# Altium PCB Copy of brd2.PcbDoc
Units mil, origin at the board's own origin, x right, y up, seen from the top; angles counter-clockwise.
Board outline 3500 x 2000 mil, 2 copper layers (Top Layer, Bottom Layer), stack 61.756 mil thick; 51 components, 36 nets, 157 pads, 0 vias.
Unrouted connection lines stored in the file: 82.
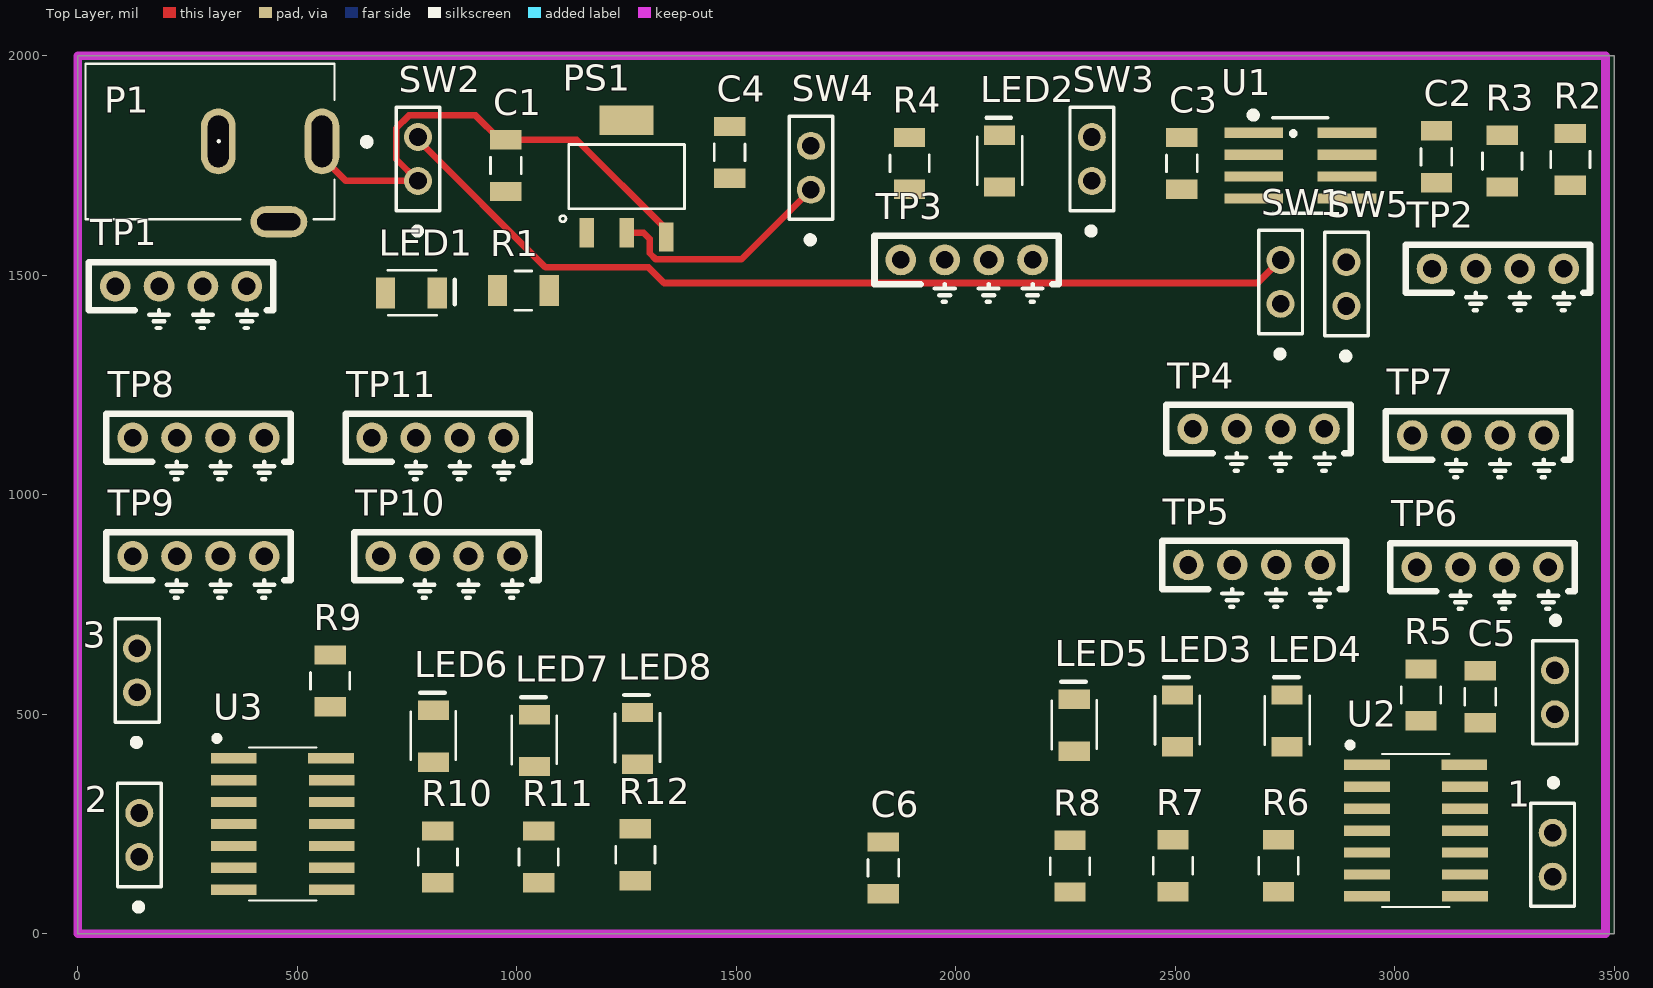
[diagram p0: Top Layer view]
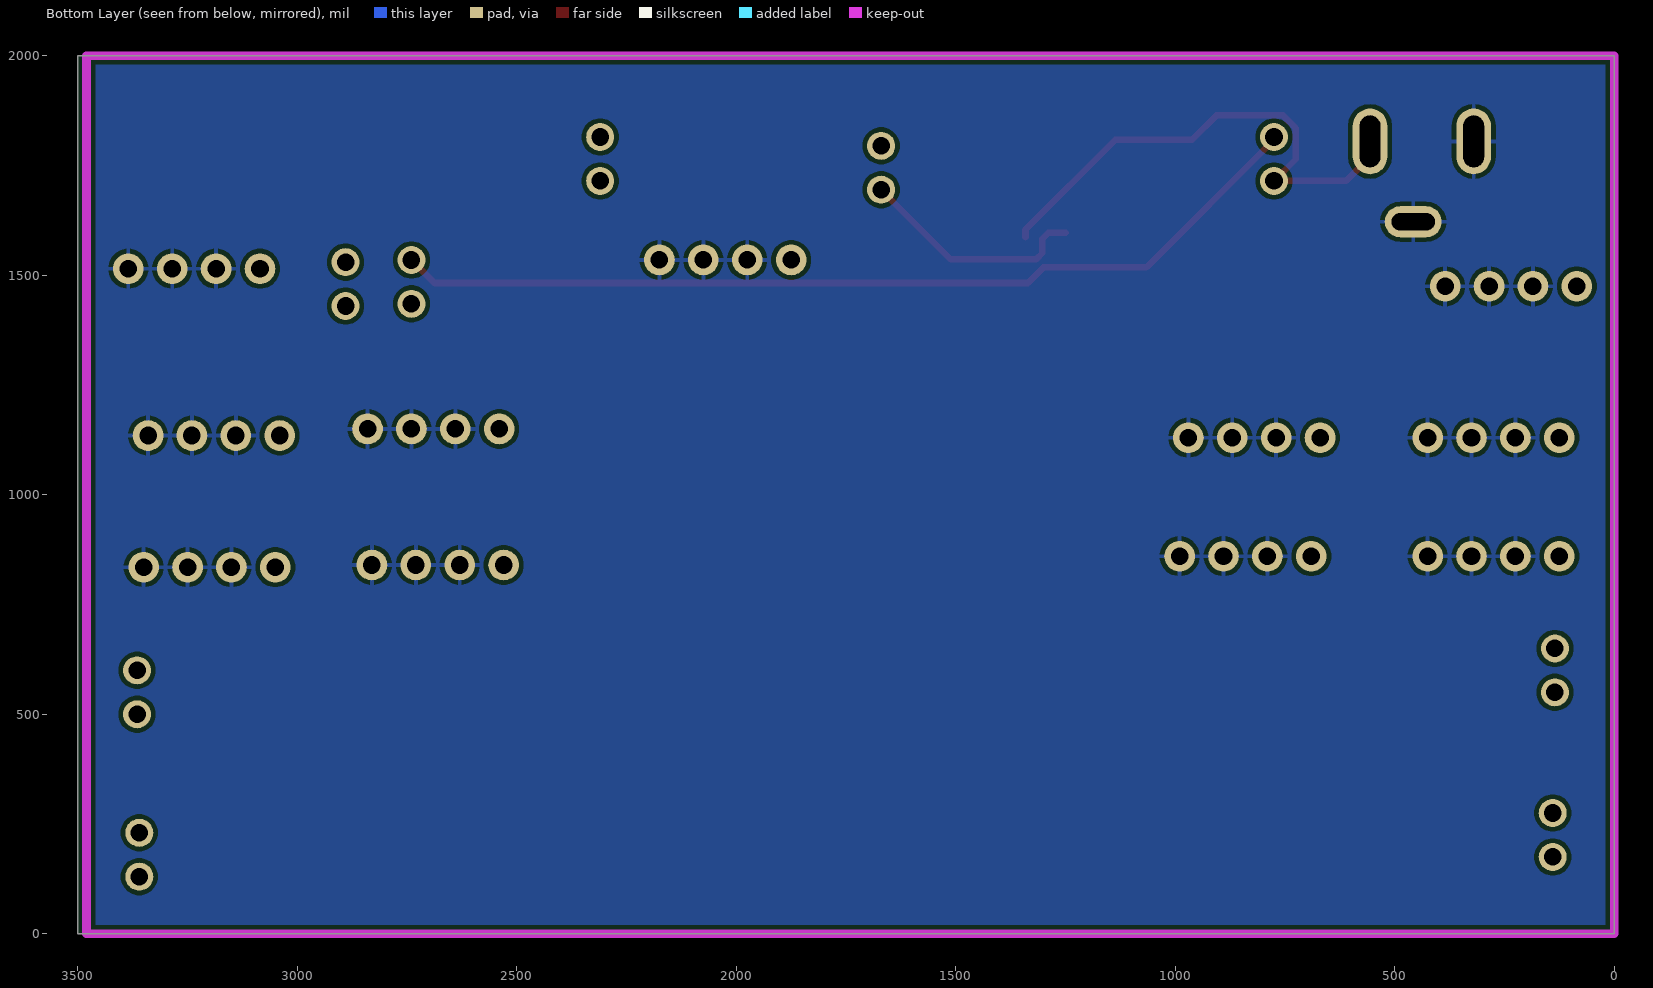
[diagram p1: Bottom Layer view, seen from below]

## Layer stack, top to bottom
Top Solder: solder mask 1, SM-001, Dk 4
Top Layer: signal copper 1.378
Dielectric 1: core 59, Core-043, Dk 4.3
Bottom Layer: signal copper 1.378
Bottom Solder: solder mask 1, SM-001, Dk 4

## Board outline
0,0 3500,0 3500,2000 0,2000

## Design rules (kind name [scope] priority, off if disabled: settings)
BoardOutlineClearance [All] p1: gap=10 ignorepadtopadclearanceinfootprint=FALSE except(0: Arc-SplitContinuation Track-SplitContinuation SMDPad-SplitContinuation THPad-SplitContinuation Via-SplitContinuation Fill-SplitContinuation Poly-SplitContinuation Region-SplitContinuation Text-SplitContinuation)
Clearance [All] p1: gap=10 ignorepadtopadclearanceinfootprint=FALSE
PlaneClearance [All] p1: clearance=10
PlaneConnect [All] p1: planeconnectstyle=Direct reliefexpansion=20 reliefentries=4 reliefconductorwidth=10 reliefairgap=10
PolygonConnect [All] p1: thpad.connectstyle=Relief thpad.reliefconductorwidth=10 thpad.reliefentries=4 thpad.polygonreliefangle="90 Angle" thpad.airgapwidth=10 smdpad.connectstyle=Direct smdpad.reliefconductorwidth=10 smdpad.reliefentries=4 smdpad.polygonreliefangle="90 Angle" smdpad.airgapwidth=10 via.connectstyle=Direct via.reliefconductorwidth=10 via.reliefentries=4 via.polygonreliefangle="90 Angle" via.airgapwidth=10
RoutingVias [All] p1: holewidth=13 width=25 viastyle="Through Hole" minholewidth=13 minwidth=25 maxholewidth=60 maxwidth=80
SolderMaskExpansion [All] p1: expansion=4 istentingtop=FALSE
UnRoutedNet [All] p1: checkbadconnections=TRUE
Width [InNet('No Net')] p1: maxlimit=100 minlimit=6 preferedwidth=6 minimp=50.000000 maximp=50.000000 favimp=50.000000
27 further rules are at their usual default settings.

## Components (designator, comment, footprint, x,y, rotation, side; value= is the part's Value field where it differs from the comment)
1 "3.3v en" 2Pin-Header-Conn 3360,230 r270 top
2 "5v enable" 2Pin-Header-Conn 140,175 r90 top
3 "3.3v en" 2Pin-Header-Conn 135,550 r90 top
C1 "22uF" 1206_Passive_Capacitor 975,1750 r90 top
C2 "1uF" 1206_Passive_Capacitor 3095,1770 r90 top
C3 "22uF" 1206_Passive_Capacitor 2515,1755 r90 top
C4 "1uF" 1206_Passive_Capacitor 1485,1780 r90 top
C5 "22uF" 1206_Passive_Capacitor 3195,540 r270 top
C6 "22uF" 1206_Passive_Capacitor 1835,150 r90 top
LED1 "Red" LED_1206 760,1460 r0 top
LED2 "Red" LED_1206 2100,1760 r90 top
LED3 "Red" LED_1206 2505,485 r90 top
LED4 "Red" LED_1206 2755,485 r90 top
LED5 "Red" LED_1206 2270,475 r90 top
LED6 "Red" LED_1206 810,450 r90 top
LED7 "Red" LED_1206 1040,440 r90 top
LED8 "Red" LED_1206 1275,445 r90 top
P1 "Power Jack" Power_Jack 556.22,1805 r180 top value="CONN PWR JACK 2X5.5MM SOLDER"
PS1 "AMS1117-3.3" LDO 1250,1725 r0 top value="IC REG LINEAR 3.3V 800MA SOT223"
R1 "1k" 1206_Passive_Resitor 1015,1465 r0 top value="1K Ohm"
R2 "1k" 1206_Passive_Resitor 3400,1764 r90 top value="1K Ohm"
R3 "1k" 1206_Passive_Resitor 3245,1760 r90 top value="1K Ohm"
R4 "1k" 1206_Passive_Resitor 1895,1755 r90 top value="1K Ohm"
R5 "1k" 1206_Passive_Resitor 3060,544 r90 top value="10K Ohm"
R6 "" 1206_Passive_Resitor 2735,155 r90 top value="50 Ohm"
R7 "" 1206_Passive_Resitor 2495,155 r90 top value="50 Ohm"
R8 "" 1206_Passive_Resitor 2260,154 r90 top value="50 Ohm"
R9 "1k" 1206_Passive_Resitor 575,576 r90 top value="10K Ohm"
R10 "" 1206_Passive_Resitor 820,175 r90 top value="50 Ohm"
R11 "" 1206_Passive_Resitor 1050,175 r90 top value="50 Ohm"
R12 "" 1206_Passive_Resitor 1270,180 r90 top value="50 Ohm"
SW1 "555_off/on_switch" 2Pin-Header-Conn 2740,1435 r90 top
SW2 "5v power enable" 2Pin-Header-Conn 775,1715 r90 top
SW3 "3.3 powerline enable" 2Pin-Header-Conn 2310,1715 r90 top
SW4 "filter cap enable" 2Pin-Header-Conn 1670,1695 r90 top
SW5 "555_off/on_switch" 2Pin-Header-Conn 2890,1430 r90 top
TP1 "5v TP" TP10x_Probe 235,1475 r0 top
TP2 "555_out_tp" TP10x_Probe 3235,1515 r0 top
TP3 "3.3v tp" TP10x_Probe 2025,1535 r0 top
TP4 "Qlow TP" TP10x_Probe 2690,1150 r0 top
TP5 "!555 TP" TP10x_Probe 2680,840 r0 top
TP6 "QHigh TP" TP10x_Probe 3200,835 r0 top
TP7 "R8 TP" TP10x_Probe 3190,1135 r0 top
TP8 "Qlow TP" TP10x_Probe 275,1130 r0 top
TP9 "!555 TP" TP10x_Probe 275,860 r0 top
TP10 "QHigh TP" TP10x_Probe 840,860 r0 top
TP11 "R12 TP" TP10x_Probe 820,1130 r0 top
U1 "LMC555CMX/NOPB" TS555IDTTR 2785,1750 r0 top
U2 "SN74AHC14DR" HEX_74AC14 3048.35,235 r0 top
U3 "SN74AHC14DR" HEX_74AC14 466.65,250 r0 top
? "5v enable" 2Pin-Header-Conn 3365,600 r270 top

## Footprints (in the part's own frame and the unit in brackets; to place one, negate y for a bottom-side part, rotate by r counter-clockwise, add the part's x,y. Pads: shape width x height; smd on the part's side, far side on the other; paste and mask are expansions set on the pad)
2Pin-Header-Conn [mm]
  round 1.62 hole 1.02: 1(0,0) 2(2.54,0)
  silkscreen extent -3.03,-1.27 4.26,1.26, body extent -1.27,-1.27 3.81,1.27, height 8.13
1206_Passive_Capacitor [mil]
  rect 44x71 smd: 1(-59,0) 2(59,0)
  silkscreen extent -19,-35 19,35, body extent -63,-31 63,32, height 50
1206_Passive_Resitor [mil]
  rect 44x71 smd: 1(-59,0) 2(59,0)
  silkscreen extent -19,-45 19,45, body extent -61,-31 61,31, height 26
HEX_74AC14 [mm]
  rect 2.65x0.6 smd: 1(-2.836,3.81) 2(-2.836,2.54) 3(-2.836,1.27) 4(-2.836,0) 5(-2.836,-1.27) 6(-2.836,-2.54) 7(-2.836,-3.81) 8(2.836,-3.81) 9(2.836,-2.54) 10(2.836,-1.27) 11(2.836,0) 12(2.836,1.27) 13(2.836,2.54) 14(2.794,3.81)
  silkscreen extent -3.94,-4.43 1.95,5.08, body extent -3.18,-4.35 2.82,4.3, height 1.75
LDO [mm]
  rect 0.838x1.7 smd: 1(-2.311,-3.25) 2(0,-3.25) 3(2.311,-3.5)
  rect 3.099x1.7 smd: 4(0,3.25)
  silkscreen extent -3.86,-2.62 3.35,1.85, body extent -3.25,-3.65 3.25,3.35, height 1.85
LED_1206 [mil]
  rect 44x71 smd: 1(-59,0) 2(59,0)
  silkscreen extent -54,-51 99,51, body extent -63,-31 63,31, height 28
Power_Jack [mm]
  oval 2x3.8 hole 1.2 slot 3 at 90 deg: 1(0,0) 2(6,0)
  oval 3.3x1.8 hole 1 slot 2.5 at 0 deg: 3(2.5,4.65)
  silkscreen extent -2.79,-4.5 13.68,4.5, body extent -0.76,-4.45 13.64,4.95, height 11.49
TP10x_Probe [mil] "Small Probs footprint"
  round 70 hole 40: 1(-150,0) 2(-50,0) 2(50,0) 2(150,0)
  silkscreen extent -210,-95 210,55
TS555IDTTR [mm] "IC OSC Single Timer 2.7MHz 8SOIC"
  rect 3.4x0.6 smd: 1(-2.7,1.905) 2(-2.7,0.635) 3(-2.7,-0.635) 4(-2.7,-1.905) 5(2.7,-1.905) 6(2.7,-0.635) 7(2.7,0.635) 8(2.7,1.905)
  silkscreen extent -2.85,-2.77 1.6,3.05, body extent -3.03,-2.48 2.96,2.43, height 1.75

## Part data
1 2 3 SW1 SW2 SW3 SW4 SW5 ?: library part SW_2Pin_100mil_Switch, "2Pin Header", LCSC Part#=C124375, Type=Extended
C1 C3 C5 C6: library part C_22uF_1206, "22uF ±10% 25V X5R 1206 Multilayer Ceramic Capacitors MLCC - SMD/SMT RoHS", LCSC Part#=C12891, MFR Part #=CL31A226KAHNNNE, Datasheet=https://datasheet.lcsc.com/lcsc/1811031514_Samsung-Electro-Mechanics-CL31A226KAHNNNE_C12891.pdf, Type=basic
C2 C4: library part C_1uF_1206, "MULTILAYER CERAMIC CAPACITORS MLCC - SMD/SMT 1UF 50V 1206 ROHS", LCSC Part#=C1848, MFR Part #=CL31B105KBHNNNE, Digikey Link=https://www.digikey.com/product-detail/en/C1206C105M4RACTU/399-8150-1-ND/3471873/?itemSeq=304982366, Type=Basic
LED1 LED2 LED3 LED4 LED5 LED6 LED7 LED8: library part LED_RED_1206, "Red 621~631nm 1206 Light Emitting Diodes (LED) RoHS", LCSC Part#=C93133, MFR Part #=15-21/R6C-FQ1R1B/2T, Datasheet=https://datasheet.lcsc.com/szlcsc/1811151241_Everlight-Elec-15-21-R6C-FQ1R1B-2T_C93133.pdf, Type=Extended
P1: library part "P_Power Jack", "Power Barrel Connector Jack 2.10mm ID (0.083\"), 5.50mm OD (0.217\") Through Hole, Right Angle", LCSC Part#=C136744, MFR Part #=PJ-102A, Digikey Link=https://www.digikey.com/product-detail/en/PJ-102A/CP-102A-ND/275425/?itemSeq=304982367, Type=Extended
PS1: library part PS_AMS_LDO_3v3, "LOW DROPOUT REGULATORS(LDO) POSITIVE FIXED 1.3V @ 800MA 15V 3.3V 1A SOT-223 ROHS", LCSC Part#=C6186, MFR Part #=AMS1117-3.3, Type=Basic
R1 R2 R3 R4 R5 R9: library part R_1K_1206, "CHIP RESISTOR - SURFACE MOUNT 1KOHMS ±1% 1/4W 1206 ROHS", LCSC Part#=C4410, MFR Part #=RNCP1206FTD1K00CT, Digikey Link=https://www.digikey.com/product-detail/en/RNCP1206FTD1K00/RNCP1206FTD1K00CT-ND/2240675/?itemSeq=304982373, Type=Basic
R6 R7 R8 R10 R11 R12: library part R_100M_1206_1, "CHIP RESISTOR - SURFACE MOUNT 100MOHMS ±1% 1/4W 1206 ROHS", LCSC Part#=C59781, MFR Part #=1206W4F1006T5E, Digikey Link=https://www.digikey.com/en/products/detail/stackpole-electronics-inc/HMC1206JT100M/1742855, Type="Extended part"
TP1 TP2 TP3 TP4 TP5 TP6 TP7 TP8 TP9 TP10 TP11: library part TP_10x_Probe, "Test Point 300 mil centers"
U1: library part U_555_Fast, "555 Type, Timer/Oscillator _Single_ IC 3MHz 8-SO", LCSC Part#=C90760, Package=SOIC-8, Digikey Link=https://www.digikey.com/product-detail/en/texas-instruments/LMC555CMX-NOPB/LMC555CMX-NOPBCT-ND/1010550, MFR Part #=LMC555CMX/NOPB, Type=Extended
U2 U3: library part U_74AHC14, "Inverter IC 6 Channel Schmitt Trigger 14-SOIC", LCSC Part#=C6942, Datasheet=https://datasheet.lcsc.com/szlcsc/ON-Semicon-ON-74AC14SCX_C5482.pdf, MFR Part #=SN74AHC14DR, Type=Extended

## Nets (pads, with @x,y where several pads share a name; then routed paths per layer and width w, separated by ;. In a path a pad name is that pad's centre, name@x,y a point inside that pad or via, vN(x,y) a via of type N, cw(c..) or ccw(c..) an arc to the next point about the centre after c; other vN are vias at no path point)
555_5v: C3.1 R2.2 SW1.1 U1.4 U1.8
555_D: R2.1 R3.2 U1.7
555_output: SW5.2 TP2.1 U1.3
+5: C1.2 LED1.1 P1.1 PS1.3 SW2.1 TP1.1 | length 1169.9
  Top Layer w15: P1.1 556.22,1769.57 610.79,1715 SW2.1 725.61,1764.39 725.61,1835.46 754.54,1864.39 906.11,1864.39 961.5,1809 C1.2 1136.17,1809 1341,1604.17 PS1.3
GND: C1.1 C2.1 C3.2 C4.1 C5.1 C6.1 LED2.2 P1.2 P1.3 PS1.1 R1.1 R6.1 R7.1 R8.1 R10.1 R11.1 R12.1 TP1.2 TP2.2 TP3.2 TP4.2 TP5.2 TP6.2 TP7.2 TP8.2 TP9.2 TP10.2 TP11.2 U1.1 U2.7 U2.9 U3.7 U3.9
Net1_1: 1.1 3.1 SW3.2
Net1_2: 1.2 R5.2 U2.11
Net2_1: 2.1 ?.1 SW1.2 SW2.2 | length 2128.1
  Top Layer w15: SW2.2 775,1808.75 1065.75,1518 1300.14,1518 1335.64,1482.5 2687.5,1482.5 SW1.2
Net2_2: 2.2 C6.2 U3.14
Net3_2: 3.2 R9.2 U3.11
Net_2: ?.2 C5.2 U2.14
NetC2_2: C2.2 R3.1 U1.2 U1.6
NetC4_2: C4.2 SW4.2
NetLED1_2: LED1.2 R1.2
NetLED2_1: LED2.1 R4.1
NetLED3_1: LED3.1 U2.2
NetLED3_2: LED3.2 R7.2
NetLED4_1: LED4.1 U2.4
NetLED4_2: LED4.2 R6.2
NetLED5_1: LED5.1 U2.6
NetLED5_2: LED5.2 R8.2 TP7.1
NetLED6_1: LED6.1 U3.2
NetLED6_2: LED6.2 R10.2
NetLED7_1: LED7.1 U3.4
NetLED7_2: LED7.2 R11.2
NetLED8_1: LED8.1 U3.6
NetLED8_2: LED8.2 R12.2 TP11.1
NetPS1_2: PS1.2 PS1.4 R4.2 SW3.1 SW4.1 TP3.1 | length 530
  Top Layer w15: PS1.2 1289,1597.05 1303.13,1582.92 1303.13,1550.37 1317.25,1536.24 1511.24,1536.24 SW4.1
NetR5_1: R5.1 R9.1 SW5.1 U2.1 U2.3 U2.5 U2.13 U3.1 U3.3 U3.5 U3.13
NetTP4_1: TP4.1 U2.10
NetTP5_1: TP5.1 U2.12
NetTP6_1: TP6.1 U2.8
NetTP8_1: TP8.1 U3.10
NetTP9_1: TP9.1 U3.12
NetTP10_1: TP10.1 U3.8
"": 
pads on no net: U1.5

## Polygon pours and split planes (outlines as drawn)
GND on Bottom Layer "GND_L02_P000" (solid, pour order 0): 0,2000 3500,2000 3500,0 0,0

## Keep-outs
Keep-Out Layer:
  lines w20: 0,0 0,2000 3480,2000 3480,0 0,0